# EAGLE board Power Supply Schematic v10 (EAGLE 9.7.0)
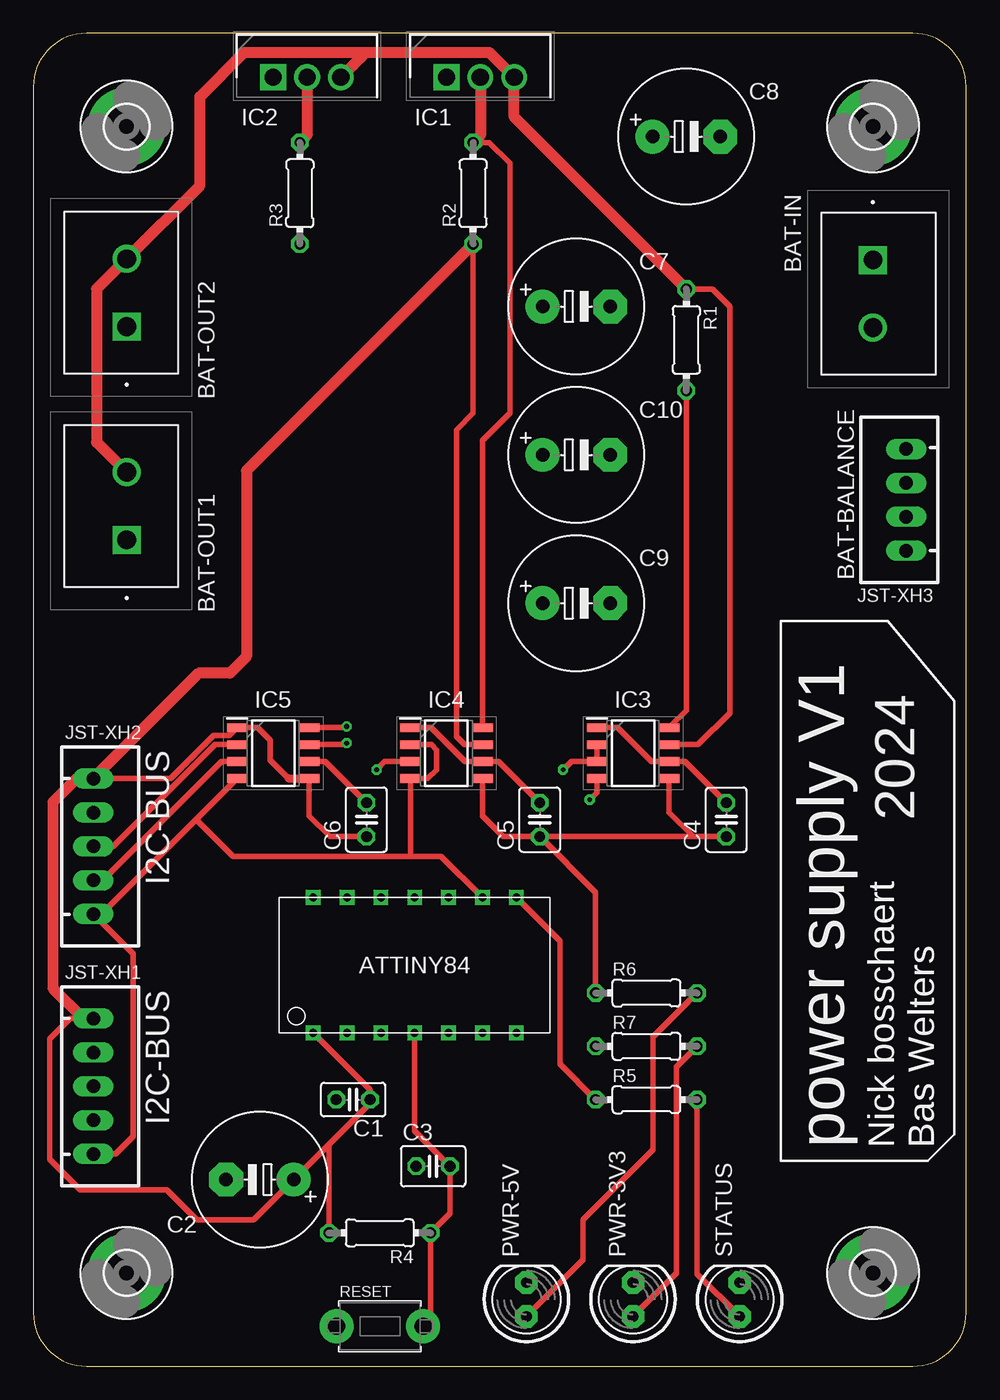
[diagram p0: board, top side]
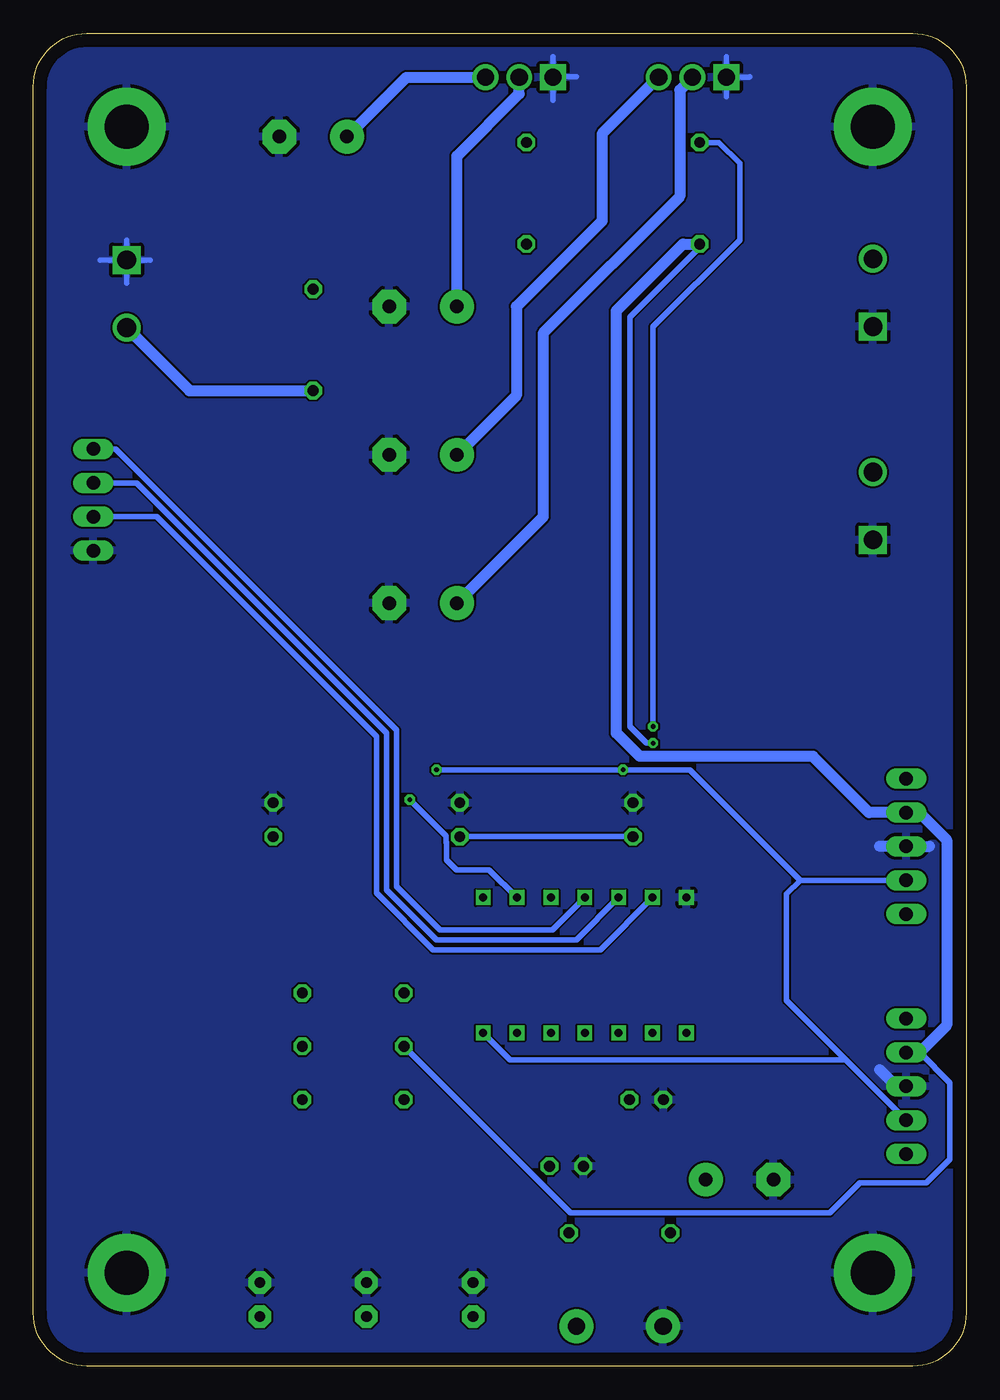
[diagram p1: board, bottom side, seen from below]

Size 70 x 100 mm. Coordinates in mm from the lower left corner, seen from the top.
Outline: 0,96 0,4 arc90 4,0 66,0 arc90 70,4 70,96 arc90 66,100 4,100 arc90 0,96
Copper layers (1*16): Top 0.035mm / dielectric 1.5mm / Bottom 0.035mm
Design rules "default": minimum track width 6mil, minimum drill 0.35mm, track to track 6mil, track to pad 6mil, pad to pad 6mil, via to via 6mil, smd to smd 6mil, copper to edge 40mil, drill to drill 6mil, minimum pad ring 10mil, minimum via ring 8mil, stop-mask expansion 4mil, vias tented up to drill 0mil, thermal gap 10mil

## Footprints (pad centres in the part's own frame; a part is rotated, then mirrored left to right if it is on the bottom)
1747993 = drill 1.4 pad 2.1 square: 1 0,0 | drill 1.4 pad 2.1: 2 5.08,0
C025-025X050 = drill 0.813 octagon: 1 -1.27,0; 2 1.27,0
E5-10,5 = drill 1.016 pad 2.54: + -2.54,0 | drill 1.016 pad 2.54 octagon: - 2.54,0
C025-030X050 = drill 0.813 octagon: 1 -1.27,0; 2 1.27,0
3,3-PAD = drill 3.3 pad 5.842: B3,3 0,0
TO254P470X1028X1955-3P = drill 1.29 pad 1.935 square: 1 0,0 | drill 1.29 pad 1.935: 2 2.54,0; 3 5.08,0
SOIC127P600X175-8N = smd 1.528 x 0.65: 1 -2.711,1.905; 2 -2.711,0.635; 3 -2.711,-0.635; 4 -2.711,-1.905; 5 2.711,-1.905; 6 2.711,-0.635; 7 2.711,0.635; 8 2.711,1.905
JST-XH-05-PACKAGE-LONG-PAD = drill 1.016 long: 1 -5.08,0; 2 -2.54,0; 3 0,0; 4 2.54,0; 5 5.08,0
JST-XH-04-PACKAGE-LONG-PAD = drill 1.016 long: 1 -3.81,0; 2 -1.27,0; 3 1.27,0; 4 3.81,0
LED5MM = drill 0.813 pad 1.676 octagon: A -1.27,0; K 1.27,0
0204/7 = drill 0.813 octagon: 1 -3.81,0; 2 3.81,0
TACT_PANA-EVQ = drill 1.3 pad 2.54: P$1 -3.25,0; P$2 3.25,0
ATTINY84(DIP) = drill 0.6 square: GND 10.16,0; PA0 10.16,-2.54; PA1 10.16,-5.08; PA2 10.16,-7.62; PA3 10.16,-10.16; PA4 10.16,-12.7; PA5 10.16,-15.24; PA6 0,-15.24; PA7 0,-12.7; PB0 0,-2.54; PB1 0,-5.08; PB2 0,-10.16; PB3 0,-7.62; VCC 0,0

## Placement (x,y rotation side)
BAT-IN  1747993  [1747993]  63,83 270 top
BAT-OUT1  1747993  [1747993]  7,62 90 top
BAT-OUT2  1747993  [1747993]  7,78 90 top
C1  0.1uF  [C025-025X050]  24,20 180 top
C2  10uF  [E5-10,5]  17,14 180 top
C3  0.1uF  [C025-030X050]  30,15 0 top
C4  0.1uF  [C025-030X050]  52,41 90 top
C5  0.1uF  [C025-030X050]  38,41 90 top
C6  0.1uF  [C025-030X050]  25,41 90 top
C7  10uF  [E5-10,5]  40.75,79.5 0 top
C8  10uF  [E5-10,5]  49,92.25 0 top
C9  10uF  [E5-10,5]  40.75,57.25 0 top
C10  10uF  [E5-10,5]  40.75,68.38 0 top
H1  MOUNT-PAD-ROUND3.3  [3,3-PAD]  7,7 0 top
H2  MOUNT-PAD-ROUND3.3  [3,3-PAD]  7,93 0 top
H3  MOUNT-PAD-ROUND3.3  [3,3-PAD]  63,93 0 top
H4  MOUNT-PAD-ROUND3.3  [3,3-PAD]  63,7 0 top
IC1  LM1117T-5.0_NOPB  [TO254P470X1028X1955-3P]  31,96.7 0 top
IC2  LM1117T-3.3_NOPB  [TO254P470X1028X1955-3P]  18,96.7 0 top
IC3  INA219BIDR  [SOIC127P600X175-8N]  45,46 0 top
IC4  INA219BIDR  [SOIC127P600X175-8N]  31,46 0 top
IC5  INA219BIDR  [SOIC127P600X175-8N]  18,46 0 top
JST-XH1  I2C-BUS  [JST-XH-05-PACKAGE-LONG-PAD]  4.5,21 270 top
JST-XH2  I2C-BUS  [JST-XH-05-PACKAGE-LONG-PAD]  4.5,39 270 top
JST-XH3  BAT-BALANCE  [JST-XH-04-PACKAGE-LONG-PAD]  65.5,65 90 top
PWR-3V3  GN  [LED5MM]  45,5 90 top
PWR-5V  GN  [LED5MM]  37,5 90 top
R1  12m  [0204/7]  49,77 270 top
R2  tbd  [0204/7]  33,88 90 top
R3  tbd  [0204/7]  20,88 90 top
R4  10k  [0204/7]  26,10 180 top
R5  220  [0204/7]  46,20 0 top
R6  220  [0204/7]  46,28 0 top
R7  220  [0204/7]  46,24 0 top
RESET  [TACT_PANA-EVQ]  26,3 0 top
STATUS  RD  [LED5MM]  53,5 90 top
U$1  ATTINY84DIP  [ATTINY84(DIP)]  21,25 90 top

## Library data of the parts
BAT-IN BAT-OUT1 BAT-OUT2 = SamacSys_Parts; DESCRIPTION: PCB header, nominal cross section: 2.5 mm?, color: green, nominal current: 12 A, rated voltage (III/2): 320 V, contact surface: Gold, type of contact: Male connector, Number of potentials: 2, Number of rows: 1, Number of positions per row: 2, number of connections: 2, product range: MSTBVA 2,5/..-G, pitch: 5.08 mm, mounting: Wave soldering, pin layout: Linear pinning, solder pin [P]: 3.9 mm, Stecksystem: CLASSIC COMBICON, Locking: without, type of packaging: packed in cardboard; HEIGHT: 12.15mm; MANUFACTURER_NAME: Phoenix Contact; MANUFACTURER_PART_NUMBER: 1747993; MOUSER_PART_NUMBER: 651-1747993; MOUSER_PRICE-STOCK: https://www.mouser.co.uk/ProductDetail/Phoenix-Contact/1747993?qs=cq3Rj917t3li0%2FrJTXaRgg%3D%3D
C1-C10 = rcl; SPICEPREFIX: C
H1-H4 = holes
IC1 = SamacSys_Parts; DESCRIPTION: Space saving 800-mA low-dropout linear regulator with internal current limit; HEIGHT: 4.7mm; MANUFACTURER_NAME: Texas Instruments; MANUFACTURER_PART_NUMBER: LM1117T-5.0/NOPB; MOUSER2_PART_NUMBER: 926-LM1117T-50/NOPB; MOUSER2_PRICE-STOCK: https://www.mouser.com/Search/Refine.aspx?Keyword=926-LM1117T-50%2FNOPB
IC2 = SamacSys_Parts; DESCRIPTION: 800mA,3.3V,LDO Voltage Reg.,LM1117T-3.3 Texas Instruments LM1117T-3.3/NOPB, LDO Voltage Regulator, 800mA, 3.3 V; HEIGHT: 4.7mm; MANUFACTURER_NAME: Texas Instruments; MANUFACTURER_PART_NUMBER: LM1117T-3.3/NOPB
IC3-IC5 = SamacSys_Parts; DESCRIPTION: 26-V, Bidirectional, Zero-Drift, High-Side, I2C Out Current/Power Monitor; HEIGHT: 1.75mm; MANUFACTURER_NAME: Texas Instruments; MANUFACTURER_PART_NUMBER: INA219BIDR; MOUSER_PART_NUMBER: 595-INA219BIDR; MOUSER_PRICE-STOCK: https://www.mouser.co.uk/ProductDetail/Texas-Instruments/INA219BIDR?qs=1WmUhT%2FVMINyGsXNJcdD5Q%3D%3D
JST-XH1-JST-XH3 = Rembrandt Electronics - JST XH Connectors v1-0
PWR-3V3 PWR-5V RESET STATUS = adafruit
R1-R7 = rcl; SPICEPREFIX: R
U$1 = RobotMower_Eagle_Library

## Nets
3V3: IC5.7 JST-XH1.2 JST-XH2.2 R3.1 R7.1
5V: C1.1 C2.+ C4.1 C5.1 C6.1 IC3.5 IC4.5 IC4.7 IC5.1 IC5.5 JST-XH1.1 JST-XH2.1 R2.1 R4.2 R6.1 U$1.VCC
BAT+: BAT-OUT1.2 BAT-OUT2.2 C8.+ C10.+ IC1.3 IC2.3 IC3.7 R1.1
GND: BAT-IN.1 BAT-OUT1.1 BAT-OUT2.1 C1.2 C2.- C3.1 C4.2 C5.2 C6.2 C7.- C8.- C9.- C10.- H1.B3,3 H2.B3,3 H3.B3,3 H4.B3,3 IC1.1 IC2.1 IC3.1 IC3.6 IC4.1 IC4.6 IC5.2 IC5.6 JST-XH1.3 JST-XH2.3 JST-XH3.1 PWR-3V3.K PWR-5V.K RESET.P$1 STATUS.K U$1.GND
N$1: BAT-IN.2 IC3.8 R1.2
N$2: JST-XH3.2 U$1.PA0
N$3: JST-XH3.3 U$1.PA1
N$4: JST-XH3.4 U$1.PA2
N$5: C7.+ IC1.2 IC4.8 R2.2
N$6: C9.+ IC2.2 IC5.8 R3.2
N$7: R5.1 U$1.PA5
N$8: R5.2 STATUS.A
N$9: PWR-5V.A R6.2
N$10: PWR-3V3.A R7.2
RST: C3.2 R4.1 RESET.P$2 U$1.PB3
SCL: IC3.4 IC4.2 IC4.4 IC5.4 JST-XH1.5 JST-XH2.5 U$1.PA4
SDA: IC3.2 IC3.3 IC4.3 IC5.3 JST-XH1.4 JST-XH2.4 U$1.PA6

## Tracks (layer width: path | path; a pad name or v marks a point on that pad's centre or on a via)
3V3  (via drill 0.35)
  Top 0.406: v23.5,46.75 23.39,46.63 IC5.7
  Bottom 0.406: R7.1 29.69,11.5 10.25,11.5 8,13.75 3,13.75 1.22,15.53 1.22,21.26 3.5,23.54 | R3.1 20,83.94 25.25,78.69 25.25,48 24,46.75 v23.5,46.75
  Bottom 0.813: R3.1 21.25,84.19 26.25,79.19 26.25,47.5 24.5,45.75 11.5,45.75 7.29,41.54 JST-XH2.2 3.51,41.54 1.47,39.5 1.47,25.57 3.5,23.54 JST-XH1.2
5V
  Top 0.406: R2.1 33,71.5 31.75,70.25 31.75,47.25 32.37,46.63 IC4.7 | IC5.5 20.71,41.29 22.27,39.73 C6.1 | C5.1 35.25,39.73 33.71,41.27 IC4.5 | 19.16,44.09 17.75,45.5 17.75,47 16.84,47.91 IC5.1 14.7,47.32 13.53,47.32 10.29,44.08 JST-XH2.1 | IC3.5 47.71,41.54 49.52,39.73 C4.1 C5.1 | 3.75,26.08 2.75,26.08 1.22,24.55 1.22,15.53 3.5,13.25 10,13.25 12.25,11 16.54,11 C2.+ 22.19,16.65 | 22.19,16.65 25.27,19.73 C1.1 25.27,20.73 U$1.VCC | R4.2 22.19,16.65 | C5.1 42.19,35.54 R6.1
  Top 0.61: 19.16,44.09 IC5.5
  Top 0.813: JST-XH1.1 3.75,26.08 1.47,28.36 1.47,42.3 3.25,44.08 JST-XH2.1 12.42,52 14.75,52 16,53.25 16,67.19 R2.1
  Bottom 0.406: C6.1 C5.1
BAT+
  Top 0.406: R1.1 50.94,80.81 52.25,79.5 52.25,49 49.88,46.63 IC3.7
  Top 0.813: R1.1 36.08,93.73 IC1.3 34.2,98.58 24.96,98.58 | IC2.3 24.96,98.58 | 24.96,98.58 15.83,98.58 12.5,95.25 12.5,88.58 BAT-OUT2.2 4.75,80.83 4.75,69.33 BAT-OUT1.2
  Bottom 0.813: C8.+ 42.01,96.7 IC1.3 | IC2.3 27.33,92.45 27.33,85.92 33.75,79.5 33.75,72.83 C10.+
GND
  Top 0.406: C4.2 48.91,45.37 IC3.6 46.38,45.37 43.84,47.91 IC3.1 | C5.2 34.91,45.37 IC4.6 32.38,45.37 29.84,47.91 IC4.1 | C6.2 21.91,45.37 IC5.6 | IC5.2 13.63,46.63 6,39 JST-XH2.3
  Bottom 0.406: IC2.1 16.3,96.7 16.25,96.75 | IC2.1 18,98.25 | IC2.1 18,95.25 | IC1.1 31,98.25 | IC1.1 30.95,96.75 29.25,96.75 | IC1.1 31,95 | BAT-IN.1 61.25,83 | BAT-IN.1 65,83 | BAT-IN.1 63,84.5 | BAT-IN.1 63,81.25
  Bottom 0.813: 2.75,39 JST-XH2.3 6.5,39 | JST-XH1.3 5.25,21 6.5,22.25
  pour Bottom: -1.7,-2.7 70.87,-2.7 71.7,-1.87 71.7,101.7 -1.7,101.7
N$1
  Top 0.406: R1.2 49,49.19 IC3.8
  Bottom 0.813: BAT-IN.2 58.27,73.19 R1.2
N$2
  Bottom 0.406: JST-XH3.2 60.75,63.73 44.25,47.23 44.25,35.5 40,31.25 27.45,31.25 U$1.PA0
N$3
  Bottom 0.406: JST-XH3.3 62.25,66.27 43.5,47.52 43.5,35.75 39.75,32 29.24,32 U$1.PA1
N$4
  Bottom 0.406: JST-XH3.4 63.81,68.81 42.75,47.75 42.75,36 39.5,32.75 31.03,32.75 U$1.PA2
N$5
  Top 0.406: R2.2 34.19,91.81 35.75,90.25 35.75,71.5 33.71,69.46 IC4.8
  Top 0.813: IC1.2 33.54,92.35 R2.2
  Bottom 0.813: C7.+ 38.21,90.79 33.54,95.46 IC1.2
N$6  (via drill 0.35)
  Top 0.406: v23.5,48 23.41,47.91 IC5.8
  Top 0.813: IC2.2 20.54,92.35 R3.2
  Bottom 0.406: R3.2 18.56,91.81 17,90.25 17,84.5 23.5,78 v23.5,48
  Bottom 0.813: IC2.2 21.5,95.74 21.5,87.75 31.75,77.5 31.75,63.71 C9.+
N$7
  Top 0.406: R5.1 39.5,22.69 39.5,31.9 U$1.PA5
N$8
  Top 0.406: R5.2 49.81,6.92 STATUS.A
N$9
  Top 0.406: R6.2 46.5,24.69 46.5,16.25 41.25,11 41.25,7.98 PWR-5V.A
N$10
  Top 0.406: R7.2 48.25,22.44 48.25,22.25 48.25,6.98 PWR-3V3.A
RST
  Top 0.406: U$1.PB3 28.62,17.65 C3.2 31.27,11.46 R4.1 29.81,3.56 RESET.P$2
SCL  (via drill 0.35)
  Top 0.406: 12.22,41.03 5.11,33.92 JST-XH2.5 7.5,30.92 7.5,17.25 6.17,15.92 JST-XH1.5 | 12.22,41.03 IC5.4 | U$1.PA4 30.61,38.25 28.25,38.25 | 28.25,38.25 15,38.25 12.22,41.03 | 28.25,38.25 28.29,38.29 IC4.4 29.59,44.09 30.25,44.75 30.25,46.25 29.86,46.63 IC4.2 | IC3.4 42.29,43.04 v41.75,42.5
  Bottom 0.406: v41.75,42.5 39.02,39.77 39.02,39.31 39,39.29 39,38 38.25,37.25 35.79,37.25 U$1.PA4
SDA  (via drill 0.35)
  Top 0.406: IC5.3 14.12,45.37 5.21,36.46 JST-XH2.4 | v39.75,44.75 40.37,45.37 IC3.3 IC3.2 | IC4.3 26.36,45.37 v25.75,44.75
  Bottom 0.406: JST-XH1.4 9.04,23 | 9.04,23 34.24,23 U$1.PA6 | 12.46,36.46 20.75,44.75 v25.75,44.75 v39.75,44.75 | JST-XH2.4 12.46,36.46 | 12.46,36.46 13.5,35.42 13.5,27.46 9.04,23

## Text on the board
tPlace: 2024 | power supply V1 | Nick bosschaert / Bas Welters